# EAGLE board CT_schematic (EAGLE 7.6.0)

Size 100 x 80 mm. Coordinates in mm from the lower left corner, seen from the top.
Outline: 0,0 100,0 100,80 0,80 0,0
Copper layers (1*16): Top 0.035mm / dielectric 1.5mm / Bottom 0.035mm
Design rules "default": minimum track width 10mil, minimum drill 24mil, track to track 8mil, track to pad 8mil, pad to pad 8mil, via to via 8mil, smd to smd 8mil, copper to edge 40mil, drill to drill 8mil, minimum pad ring 10mil, minimum via ring 8mil, stop-mask expansion 4mil, vias tented up to drill 0mil, thermal gap 10mil

## Footprints (pad centres in the part's own frame; a part is rotated, then mirrored left to right if it is on the bottom)
C0603 = smd 0.8 x 0.8: 1 -0.762,0; 2 0.762,0
C0402 = smd 0.5 x 0.5: 1 -0.508,0; 2 0.508,0
C1210 = smd 1.2 x 2.5: 1 -1.524,0; 2 1.524,0
EXV-9H = smd 3.505 x 1.676: 1 -2.857,0; 2 2.857,0
L0603 = smd 0.8 x 0.8: 1 -0.762,0; 2 0.762,0
PJ-037B_PACKAGE = drill 3.7 square: 1 12,0 | drill 3.2 square: 2 6,0
R0603 = smd 0.8 x 0.8: 1 -0.762,0; 2 0.762,0
TFBGA64 = smd 0.35 x 0.35: A1 -1.75,1.75; A2 -1.25,1.75; A3 -0.75,1.75; A4 -0.25,1.75; A5 0.25,1.75; A6 0.75,1.75; A7 1.25,1.75; A8 1.75,1.75; B1 -1.75,1.25; B2 -1.25,1.25; B3 -0.75,1.25; B4 -0.25,1.25; B5 0.25,1.25; B6 0.75,1.25; B7 1.25,1.25; B8 1.75,1.25; C1 -1.75,0.75; C2 -1.25,0.75; C3 -0.75,0.75; C4 -0.25,0.75; C5 0.25,0.75; C6 0.75,0.75; C7 1.25,0.75; C8 1.75,0.75; D1 -1.75,0.25; D2 -1.25,0.25; D3 -0.75,0.25; D4 -0.25,0.25; D5 0.25,0.25; D6 0.75,0.25; D7 1.25,0.25; D8 1.75,0.25; E1 -1.75,-0.25; E2 -1.25,-0.25; E3 -0.75,-0.25; E4 -0.25,-0.25; E5 0.25,-0.25; E6 0.75,-0.25; E7 1.25,-0.25; E8 1.75,-0.25; F1 -1.75,-0.75; F2 -1.25,-0.75; F3 -0.75,-0.75; F4 -0.25,-0.75; F5 0.25,-0.75; F6 0.75,-0.75; F7 1.25,-0.75; F8 1.75,-0.75; G1 -1.75,-1.25; G2 -1.25,-1.25; G3 -0.75,-1.25; G4 -0.25,-1.25; G5 0.25,-1.25; G6 0.75,-1.25; G7 1.25,-1.25; G8 1.75,-1.25; H1 -1.75,-1.75; H2 -1.25,-1.75; H3 -0.75,-1.75; H4 -0.25,-1.75; H5 0.25,-1.75; H6 0.75,-1.75; H7 1.25,-1.75; H8 1.75,-1.75
LGA63S127P16X13_2050X1750X150 = smd 0.9 x 0.9: 1 -9.525,-8.05; 2 -8.255,-8.05; 3 -6.985,-8.05; 4 -5.715,-8.05; 5 -4.445,-8.05; 6 -3.175,-8.05; 7 -1.905,-8.05; 8 -0.635,-8.05; 9 0.635,-8.05; 10 1.905,-8.05; 11 3.175,-8.05; 12 4.445,-8.05; 13 5.715,-8.05; 14 6.985,-8.05; 15 8.255,-8.05; 16 9.525,-8.05; 17 9.525,-6.35; 18 9.525,-5.08; 19 9.525,-3.81; 20 9.525,-2.54; 21 9.525,-1.27; 22 9.525,0; 23 9.525,1.27; 24 9.525,2.54; 25 9.525,3.81; 26 9.525,5.08; 27 9.525,6.35; 28 9.525,8.05; 29 8.255,8.05; 30 6.985,8.05; 31 5.715,8.05; 32 4.445,8.05; 33 3.175,8.05; 34 1.905,8.05; 35 0.635,8.05; 36 -0.635,8.05; 37 -1.905,8.05; 38 -3.175,8.05; 39 -4.445,8.05; 40 -5.715,8.05; 41 -6.985,8.05; 42 -8.255,8.05; 43 -9.525,8.05; 44 -9.525,6.35; 45 -9.525,5.08; 46 -9.525,3.81; 47 -9.525,2.54; 48 -9.525,1.27; 49 -9.525,0; 50 -9.525,-1.27; 51 -9.525,-2.54; 52 -9.525,-3.81; 53 -9.525,-5.08; 54 -9.525,-6.35 | smd 2.2 x 2.2: 55 -4.5,-4.5; 56 -1.5,-4.5; 57 1.5,-4.5; 58 -4.5,-1.5; 59 -1.5,-1.5; 60 1.5,-1.5; 61 -4.5,1.5; 62 -1.5,1.5; 63 1.5,1.5
COAXIAL_C = smd 1 x 1: 1 0,-1.5; 2 0,1.5 | smd 1.05 x 2.2: 3 -1.475,0; 4 1.475,0
TST-110-05-T-D-RA = drill 1 pad 1.7 square: 1 0,0 | drill 1 pad 1.7: 2 0,2.54; 3 2.54,0; 4 2.54,2.54; 5 5.08,0; 6 5.08,2.54; 7 7.62,0; 8 7.62,2.54; 9 10.16,0; 10 10.16,2.54; 11 12.7,0; 12 12.7,2.54; 13 15.24,0; 14 15.24,2.54; 15 17.78,0; 16 17.78,2.54; 17 20.32,0; 18 20.32,2.54; 19 22.86,0; 20 22.86,2.54
TDFN-8/6MM = smd 0.3 x 0.75: 1 0,0; 2 0.5,0; 3 1,0; 4 1.5,0; 5 1.5,3; 6 1,3; 7 0.5,3; 8 0,3
USB-A-H = drill 0.914: 1 2.718,3.493; 2 2.718,1.003; 3 2.718,-1.003; 4 2.718,-3.493 | drill 2.311: 5 0,-6.566; 6 0,6.566
SOT143B = smd 1 x 0.7: 1 -0.75,-1 | smd 0.6 x 0.7: 2 0.95,-1; 3 0.95,1; 4 -0.95,1
ABLS-25.000MHZ-B2F-T = smd 5.6 x 2.8: 1 -3.81,0; 2 5.69,0
ASEK = smd 1.4 x 1: 1 -1.1,-0.8; 2 1.1,-0.8; 3 1.1,0.8; 4 -1.1,0.8
WSON-8 = smd 0.3 x 0.6: 1 -0.75,0; 2 0.05,0; 3 0.85,0; 4 1.65,0; 5 1.65,3.8; 6 0.85,3.8; 7 0.05,3.8; 8 -0.75,3.8 | smd 3 x 2.6: PAD 0.45,1.9
SON-6 = smd 0.55 x 0.3: 1 -0.355,0.5 | smd 0.52 x 0.3: 2 -0.37,0; 3 -0.37,-0.5; 4 0.37,-0.5; 5 0.37,0; 6 0.37,0.5
SW_4-1437565-2 = smd 1.4 x 2.1: 1 -2.23,4.55; 2 -2.23,-4.55; 3 2.23,4.55; 4 2.23,-4.55
LGM67K-G1J2-24-Z = smd 0.8 x 1.4: A -2,0; C 0,0
NC7SZ125M5X = smd 1.3 x 0.7: 1 -1.3,0.95; 2 -1.3,0; 3 -1.3,-0.95; 4 1.3,-0.95; 5 1.3,0.95
DUMMY_PACKAGE_165 = drill 0.3: 1 0,-1; 2 1.5,-1

## Placement (x,y rotation side)
C1  1e-07  [C0603]  -68.58,68.58 0 top  (outside the outline)
C2  1e-07  [C0603]  -72.39,68.58 0 top  (outside the outline)
C3  1e-07  [C0603]  -15.24,73.66 0 top  (outside the outline)
C4  1e-07  [C0603]  -19.05,73.66 0 top  (outside the outline)
C5  4.7e-06  [C0603]  -64.77,68.58 0 top  (outside the outline)
C6  1e-07  [C0603]  -22.86,73.66 0 top  (outside the outline)
C7  1e-08  [C0603]  -26.67,73.66 0 top  (outside the outline)
C8  1e-06  [C0603]  -30.48,73.66 0 top  (outside the outline)
C9  1e-11  [C0402]  -24.13,78.74 0 top  (outside the outline)
C10  1e-11  [C0402]  -27.94,78.74 0 top  (outside the outline)
C11  1e-12  [C0402]  -31.75,78.74 0 top  (outside the outline)
C12  2.2e-05  [C1210]  -71.12,55.88 0 top  (outside the outline)
C13  1e-07  [C0402]  -35.56,78.74 0 top  (outside the outline)
C14  1e-07  [C0402]  -39.37,78.74 0 top  (outside the outline)
C15  1e-07  [C0402]  -43.18,78.74 0 top  (outside the outline)
C16  1e-07  [C0402]  -46.99,78.74 0 top  (outside the outline)
C17  1e-08  [C0402]  -50.8,78.74 0 top  (outside the outline)
C18  1e-08  [C0402]  -54.61,78.74 0 top  (outside the outline)
C19  1e-08  [C0402]  -58.42,78.74 0 top  (outside the outline)
C20  1e-05  [C1210]  -16.51,63.5 0 top  (outside the outline)
C21  1e-05  [C1210]  -22.86,63.5 0 top  (outside the outline)
C22  1e-07  [C0402]  -62.23,78.74 0 top  (outside the outline)
C23  0.0001  [EXV-9H]  -17.78,55.88 0 top  (outside the outline)
C24  0.0001  [EXV-9H]  -29.21,55.88 0 top  (outside the outline)
C25  1e-08  [C0402]  -66.04,78.74 0 top  (outside the outline)
C26  1e-08  [C0402]  -69.85,78.74 0 top  (outside the outline)
C27  1e-08  [C0402]  -73.66,78.74 0 top  (outside the outline)
F1  240.0  [L0603]  -34.29,73.66 0 top  (outside the outline)
I1  3.6e-09  [C0402]  -20.32,78.74 0 top  (outside the outline)
J1  PJ-037B  [PJ-037B_PACKAGE]  -69.85,7.62 0 top  (outside the outline)
R2  1000.0  [R0603]  -38.1,73.66 0 top  (outside the outline)
R4  4700.0  [R0603]  -41.91,73.66 0 top  (outside the outline)
R5  4700.0  [R0603]  -45.72,73.66 0 top  (outside the outline)
R6  2200.0  [R0603]  -49.53,73.66 0 top  (outside the outline)
R7  2200.0  [R0603]  -53.34,73.66 0 top  (outside the outline)
R8  2200.0  [R0603]  -57.15,73.66 0 top  (outside the outline)
R9  2200.0  [R0603]  -60.96,73.66 0 top  (outside the outline)
R10  10000.0  [R0603]  -67.31,62.23 0 top  (outside the outline)
R11  100000.0  [R0603]  -46.99,62.23 0 top  (outside the outline)
R12  2700.0  [R0603]  -64.77,73.66 0 top  (outside the outline)
R13  10000.0  [R0603]  -72.39,62.23 0 top  (outside the outline)
R14  10000.0  [R0603]  -15.24,68.58 0 top  (outside the outline)
R15  10000.0  [R0603]  -20.32,68.58 0 top  (outside the outline)
R16  10000.0  [R0603]  -25.4,68.58 0 top  (outside the outline)
R17  10000.0  [R0603]  -30.48,68.58 0 top  (outside the outline)
R18  10000.0  [R0603]  -35.56,68.58 0 top  (outside the outline)
R19  10000.0  [R0603]  -40.64,68.58 0 top  (outside the outline)
R20  10000.0  [R0603]  -45.72,68.58 0 top  (outside the outline)
R21  10000.0  [R0603]  -50.8,68.58 0 top  (outside the outline)
R22  100000.0  [R0603]  -52.07,62.23 0 top  (outside the outline)
R23  2231.0  [R0603]  -68.58,73.66 0 top  (outside the outline)
R24  1000.0  [R0603]  -72.39,73.66 0 top  (outside the outline)
R25  10000.0  [R0603]  -55.88,68.58 0 top  (outside the outline)
R26  10000.0  [R0603]  -60.96,68.58 0 top  (outside the outline)
R27  9100.0  [R0603]  -15.24,78.74 0 top  (outside the outline)
R28  680000.0  [R0603]  -57.15,62.23 0 top  (outside the outline)
R29  120000.0  [R0603]  -62.23,62.23 0 top  (outside the outline)
U1  STM32L151R6H6A  [TFBGA64]  -60.96,27.94 0 top  (outside the outline)
U2  CC3200MODR1M2AMOBT  [LGA63S127P16X13_2050X1750X150]  -25.4,11.43 0 top  (outside the outline)
U3  73412-0114  [COAXIAL_C]  -41.91,39.37 0 top  (outside the outline)
U4  TST-110-05-T-D-RA  [TST-110-05-T-D-RA]  -46.99,45.72 0 top  (outside the outline)
U5  24AA32AT-I/MNY  [TDFN-8/6MM]  -44.45,26.67 0 top  (outside the outline)
U6  61400416021  [USB-A-H]  -44.45,8.89 0 top  (outside the outline)
U7  prtr5v0u2ax  [SOT143B]  -24.13,83.82 0 top  (outside the outline)
U8  ABLS-25.000MHZ-B2F-T  [ABLS-25.000MHZ-B2F-T]  -48.26,55.88 0 top  (outside the outline)
U9  ASEK-32.768KHz-ECST  [ASEK]  -66.04,48.26 0 top  (outside the outline)
U10  LP3878SDX-ADJ/NOPB  [WSON-8]  -30.48,38.1 0 top  (outside the outline)
U11  TPS3895ADRYR  [SON-6]  -31.75,82.55 0 top  (outside the outline)
U12  4-1437565-2  [SW_4-1437565-2]  -27.94,29.21 0 top  (outside the outline)
U13  Q65110A2395  [LGM67K-G1J2-24-Z]  -59.69,55.88 0 top  (outside the outline)
U14  nc7sz125m5x  [NC7SZ125M5X]  -27.94,62.23 0 top  (outside the outline)
U15  nc7sz125m5x  [NC7SZ125M5X]  -34.29,62.23 0 top  (outside the outline)
U16  nc7sz125m5x  [NC7SZ125M5X]  -40.64,62.23 0 top  (outside the outline)
U17  Dummy  [DUMMY_PACKAGE_165]  -29.21,83.82 0 top  (outside the outline)

## Library data of the parts
C1-C27 F1 I1 J1 R2 R4-R29 U1-U17 = circuit_tree

## Nets
CLK_CRYSTAL_U1_C1: C9.1 U1.C1 U8.1
CLK_CRYSTAL_U1_D1: C10.1 U1.D1 U8.2
CLK_U1_A1: U1.A1 U9.3
GND: C1.2 C2.2 C3.2 C4.2 C5.2 C6.2 C7.2 C8.2 C9.2 C10.2 C11.2 C12.2 C13.2 C14.2 C15.2 C16.2 C17.2 C18.2 C19.2 C20.2 C21.2 C22.2 C23.2 C24.2 C25.2 C26.2 C27.2 J1.2 R2.2 R10.2 R11.2 R12.2 R18.2 R20.2 R24.2 R27.2 R29.2 U1.C2 U1.D4 U1.D5 U1.D6 U1.F1 U2.1 U2.2 U2.16 U2.27 U2.28 U2.30 U2.32 U2.38 U2.43 U2.55 U2.56 U2.57 U2.58 U2.59 U2.60 U2.61 U2.62 U2.63 U3.1 U3.2 U3.3 U3.4 U4.4 U4.6 U4.8 U4.10 U4.12 U4.14 U4.16 U4.18 U4.20 U5.4 U5.7 U6.4 U6.5 U6.6 U7.1 U9.2 U10.3 U10.PAD U11.2 U13.C U14.2 U14.3 U15.1 U15.3 U16.1 U16.3 U17.1
NET_U1_A3: R7.1 U1.A3 U2.4
NET_U1_B2: C6.1 U1.B2
NET_U1_B3: R6.1 U1.B3 U2.3
NET_U1_B4: R10.1 U1.B4
NET_U1_E1: R5.1 U1.E1 U16.4
NET_U1_G7: R8.1 U1.G7 U5.6
NET_U1_H1: C7.1 C8.1 F1.1 U1.G1 U1.H1
NET_U1_H6: U13.A
NET_U1_H7: R9.1 U1.H7 U5.5
NET_U1_H8: U12.3 U12.4
NET_U2_21: R11.1 U2.21
NET_U2_23: R12.1 U2.23
NET_U2_35: R4.1 U2.35 U15.4
NET_U3_1: C11.1 I1.1 U3.1
NET_U3_31: I1.2
NET_U4_19: R18.1 U4.19
NET_U5_1: R19.1 U5.1
NET_U5_2: R20.1 U5.2
NET_U5_3: R21.1 U5.3
NET_U7_4: U6.1 U7.4
NET_U10_1: C19.1 U10.1
NET_U10_6: R23.2 R24.1 U10.6
NET_U10_8: R22.1 U10.8
NET_U11_1: R26.1 R27.1 U11.1
NET_U11_3: R28.2 R29.1 U11.3
NET_U11_4: R25.1 U11.4 U14.4 U15.2 U16.2
NET_U12_1: R2.1 U12.1 U12.2
PROC_DAC_OUT2: U1.F4 U17.2
PROC_SYS_JTCK_SWCLK: R16.1 U1.A7 U4.9
PROC_SYS_JTDI: R14.1 U1.A6 U4.5
PROC_SYS_JTDO_TRACESWO: U1.A5 U4.13
PROC_SYS_JTMS_SWDIO: R15.1 U1.A8 U4.7
PROC_SYS_JTRST: R13.1 U1.A4 U4.3
PROC_USB_DM: U1.C8 U6.2 U7.3
PROC_USB_DP: U1.B8 U6.3 U7.2
RST_OUT_U4_SRESET_B: R17.1 U4.15 U14.1
VCC_S1_12V7: C20.1 C23.1 C24.1 J1.1 R22.2 U10.4
VCC_TIER1_3V3: C1.1 C2.1 C3.1 C4.1 C5.1 C12.1 C13.1 C14.1 C15.1 C16.1 C17.1 C18.1 C21.1 C22.1 C25.1 C26.1 C27.1 F1.2 R4.2 R5.2 R6.2 R7.2 R8.2 R9.2 R13.2 R14.2 R15.2 R16.2 R17.2 R19.2 R21.2 R23.1 R25.2 R26.2 R28.1 U1.D2 U1.E4 U1.E5 U1.E6 U2.36 U2.37 U2.40 U4.1 U4.2 U5.8 U9.4 U10.5 U11.6 U14.5 U15.5 U16.5

## Tracks (layer width: path | path; a pad name or v marks a point on that pad's centre or on a via)
CLK_CRYSTAL_U1_C1  (2 unrouted)
CLK_CRYSTAL_U1_D1  (2 unrouted)
CLK_U1_A1  (1 unrouted)
GND  (90 unrouted)
NET_U1_A3  (2 unrouted)
NET_U1_B2  (1 unrouted)
NET_U1_B3  (2 unrouted)
NET_U1_B4  (1 unrouted)
NET_U1_E1  (2 unrouted)
NET_U1_G7  (2 unrouted)
NET_U1_H1  (4 unrouted)
NET_U1_H7  (2 unrouted)
NET_U1_H8  (1 unrouted)
NET_U2_21  (1 unrouted)
NET_U2_23  (1 unrouted)
NET_U2_35  (2 unrouted)
NET_U3_1  (2 unrouted)
NET_U4_19  (1 unrouted)
NET_U5_1  (1 unrouted)
NET_U5_2  (1 unrouted)
NET_U5_3  (1 unrouted)
NET_U7_4  (1 unrouted)
NET_U10_1  (1 unrouted)
NET_U10_6  (2 unrouted)
NET_U10_8  (1 unrouted)
NET_U11_1  (2 unrouted)
NET_U11_3  (2 unrouted)
NET_U11_4  (4 unrouted)
NET_U12_1  (2 unrouted)
PROC_DAC_OUT2  (1 unrouted)
PROC_SYS_JTCK_SWCLK  (2 unrouted)
PROC_SYS_JTDI  (2 unrouted)
PROC_SYS_JTDO_TRACESWO  (1 unrouted)
PROC_SYS_JTMS_SWDIO  (2 unrouted)
PROC_SYS_JTRST  (2 unrouted)
PROC_USB_DM  (2 unrouted)
PROC_USB_DP  (2 unrouted)
RST_OUT_U4_SRESET_B  (2 unrouted)
VCC_S1_12V7  (5 unrouted)
VCC_TIER1_3V3  (50 unrouted)